# Altium PCB SMC1940-A.PcbDoc (part 2 of 2)
Units mm, origin at the board's own origin, x right, y up, seen from the top; angles counter-clockwise.
Board outline 62.1 x 94.1 mm, 2 copper layers (Top Layer, Bottom Layer); 95 components, 94 nets, 577 pads, 44 vias.
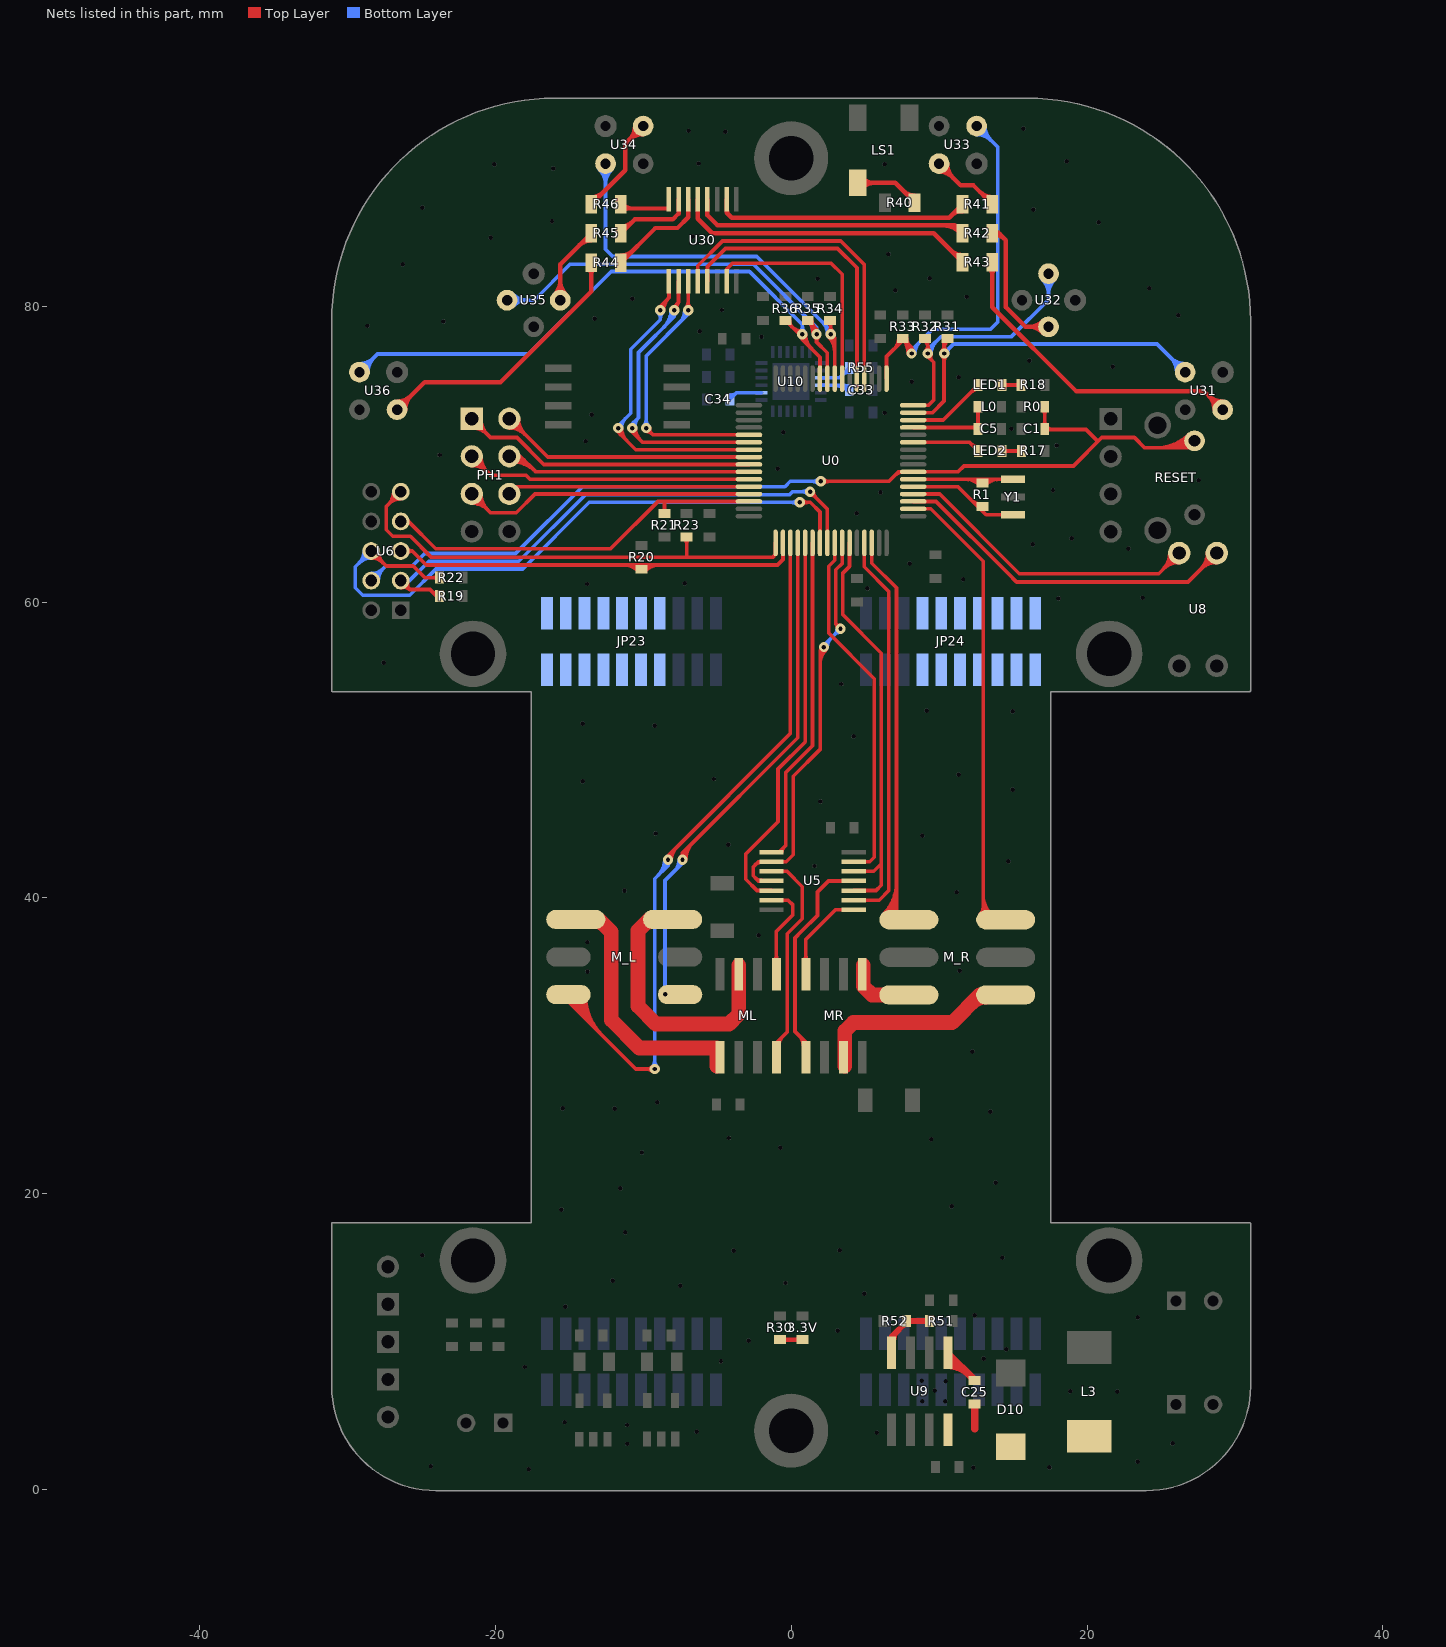
[diagram p2: the nets of this part, all layers, seen from the top]

## Via types
v1: diameter 0.7, hole 0.3, Top Layer to Bottom Layer, tented both sides, 38 vias
v2: diameter 1.2, hole 0.5, Top Layer to Bottom Layer, tented both sides, 3 vias
v3: diameter 1, hole 0.4, Top Layer to Bottom Layer, tented both sides, 3 vias

## Nets (pads, with @x,y where several pads share a name; then routed paths per layer and width w, separated by ;. In a path a pad name is that pad's centre, name@x,y a point inside that pad or via, vN(x,y) a via of type N, cw(c..) or ccw(c..) an arc to the next point about the centre after c; other vN are vias at no path point) (continued)
IN1: U0.20 U30.4 | length 21.4
  Top Layer w0.25: U30.4@-6.305,81.685 -6.305,82.735 -4.64,84.4 3.36,84.4 4.95,82.81 U0.20@4.95,75.1
IN2: U0.21 U30.5 | length 19.6
  Top Layer w0.25: U30.5@-5.655,81.685 -5.655,82.685 -4.44,83.9 3.14,83.9 4.45,82.59 U0.21@4.45,75.1
IN3: U0.23 U30.7 | length 16.8
  Top Layer w0.25: U30.7@-4.355,81.685 -4.355,82.505 -3.96,82.9 2.7,82.9 3.45,82.15 U0.23@3.45,75.1 ; U30.7@-4.33,82.36 cw(c-3.92,82.36) -4.21,82.65 ccw(c-3.92,82.36) U30.7@-4.33,82.36
IN4: U0.39 U30.1 | length 29.7
  Top Layer w0.25: v1(-11.68,71.76) -11.68,71.48 -10.5,70.3 U0.39@-2.85,70.3 ; v1(-8.84,79.72) -8.84,79.98 -8.255,80.565 U30.1@-8.255,81.685 ; v1@-11.705,71.76 ccw(c-11.089,71.76) -11.525,71.325 cw(c-11.089,71.76) v1@-11.705,71.76 ; v1@-11.455,71.76 ccw(c-10.236,71.76) -11.098,70.898 cw(c-10.236,71.76) v1@-11.455,71.76 ; v1@-8.865,79.72 cw(c-8.298,79.72) -8.699,80.121 ccw(c-8.298,79.72) v1@-8.865,79.72 ; v1@-8.615,79.72 cw(c-7.444,79.72) -8.272,80.548 ccw(c-7.444,79.72) v1@-8.615,79.72
  Bottom Layer w0.25: v1(-11.68,71.76) -11.68,71.92 -10.84,72.76 -10.84,77.08 -8.84,79.08 v1(-8.84,79.72) ; -8.84,79.177 ccw(c-9.383,79.177) -8.999,79.561 cw(c-9.383,79.177) -8.84,79.177 ; -8.84,79.177 cw(c-8.297,79.177) -8.681,79.561 ccw(c-8.297,79.177) -8.84,79.177 ; v1@-11.455,71.76 cw(c-10.526,71.76) -11.183,72.417 ccw(c-10.526,71.76) v1@-11.455,71.76
IN5: U0.38 U30.2 | length 30.9
  Top Layer w0.25: v1(-10.74,71.76) -10.74,71.5 -10.04,70.8 U0.38@-2.85,70.8 ; v1(-7.9,79.72) -7.9,79.96 -7.605,80.255 ; U30.2@-7.605,81.685 -7.605,80.255 ; -7.605,80.255 ccw(c-7.316,79.966) -7.693,79.807 cw(c-7.316,79.966) -7.605,80.255 ; v1@-10.765,71.76 ccw(c-10.198,71.76) -10.599,71.359 cw(c-10.198,71.76) v1@-10.765,71.76 ; v1@-10.515,71.76 ccw(c-9.344,71.76) -10.172,70.932 cw(c-9.344,71.76) v1@-10.515,71.76
  Bottom Layer w0.25: v1(-10.74,71.76) -10.74,72.04 -10.32,72.46 ; v1(-7.9,79.72) -7.9,79.28 ; -10.32,72.46 ccw(c-9.805,71.945) -10.519,71.804 cw(c-9.805,71.945) -10.32,72.46 ; -10.32,72.46 -10.32,76.86 -7.9,79.28 ; -7.9,79.28 ccw(c-8.218,79.28) -8.032,79.538 cw(c-8.218,79.28) -7.9,79.28 ; -7.9,79.28 cw(c-7.582,79.28) -7.768,79.538 ccw(c-7.582,79.28) -7.9,79.28 ; v1@-10.765,71.755 cw(c-10.358,71.836) -10.651,72.129 ccw(c-10.358,71.836) v1@-10.765,71.755 ; -8.595,78.585 ccw(c-9.73,79.72) -8.125,79.72 cw(c-9.73,79.72) -8.595,78.585 ; -8.168,79.012 ccw(c-8.877,79.72) -7.875,79.72 cw(c-8.877,79.72) -8.168,79.012
IN6: U0.37 U30.3 | length 26.1
  Top Layer w0.25: v1(-9.8,71.76) -9.34,71.3 U0.37@-2.85,71.3 ; v1@-6.955,79.725 U30.3@-6.955,81.685 ; -9.416,71.376 ccw(c-9.8,70.992) -9.8,71.535 cw(c-9.8,70.992) -9.416,71.376 ; -9.416,71.376 cw(c-9.032,71.76) -9.575,71.76 ccw(c-9.032,71.76) -9.416,71.376 ; v1@-7.119,79.879 ccw(c-7.515,80.275) -6.955,80.275 cw(c-7.515,80.275) v1@-7.119,79.879 ; -6.955,80.251 ccw(c-6.429,80.251) -6.801,79.879 cw(c-6.429,80.251) -6.955,80.251
  Bottom Layer w0.25: v1(-9.8,71.76) -9.8,76.62 -6.96,79.46 v1(-6.96,79.72) ; -9.8,72.303 ccw(c-9.257,72.303) -9.641,71.919 cw(c-9.257,72.303) -9.8,72.303 ; -9.8,72.303 cw(c-10.343,72.303) -9.959,71.919 ccw(c-10.343,72.303) -9.8,72.303 ; -7.528,78.892 ccw(c-8.356,79.72) -7.185,79.72 cw(c-8.356,79.72) -7.528,78.892 ; -7.101,79.319 ccw(c-7.502,79.72) -6.935,79.72 cw(c-7.502,79.72) -7.101,79.319
JNTRST: R19.1 U0.56 U6.3 | length 43.6
  Top Layer w0.25: U6.3@-26.38,61.45 -25.78,60.85 ; R19.1@-23.976,60.416 R19.1@-23.776,60.416 ; R19.1@-23.96,60.4 -24.41,60.85 -25.78,60.85 ; v1(1.28,67.46) 2.45,66.29 U0.56@2.45,64 ; -25.78,60.85 ccw(c-26.148,60.482) -26.269,60.988 cw(c-26.148,60.482) -25.78,60.85 ; -25.78,60.85 cw(c-25.412,61.218) -25.918,61.339 ccw(c-25.412,61.218) -25.78,60.85 ; 1.664,67.076 ccw(c1.28,66.692) 1.28,67.235 cw(c1.28,66.692) 1.664,67.076 ; 1.664,67.076 cw(c2.048,67.46) 1.505,67.46 ccw(c2.048,67.46) 1.664,67.076 ; -24.26,60.7 ccw(c-24.023,60.937) -23.85,60.65 cw(c-24.023,60.937) -24.26,60.7
  Bottom Layer w0.25: U6.3@-26.38,61.45 -25.79,61.45 -24.48,62.76 -18.4,62.76 -13.9,67.26 -0.1,67.26 0.1,67.46 v1(1.28,67.46) ; 0.737,67.46 ccw(c0.737,68.003) 1.121,67.619 cw(c0.737,68.003) 0.737,67.46 ; 0.737,67.46 cw(c0.737,66.917) 1.121,67.301 ccw(c0.737,66.917) 0.737,67.46
JTCK: R23.2 U0.49 U6.9 | length 37.2
  Top Layer w0.25: U6.9@-26.38,67.45 -27.37,66.46 -27.37,64.88 -26.93,64.44 -25.73,64.44 -24.31,63.02 -1.26,63.02 -1.05,63.23 U0.49@-1.05,64 ; -7.06,63.02 R23.2@-7.06,64.39 ; -27.191,66.639 ccw(c-28.002,67.45) -26.855,67.45 cw(c-28.002,67.45) -27.191,66.639 ; -27.191,66.639 cw(c-26.38,65.828) -26.38,66.975 ccw(c-26.38,65.828) -27.191,66.639 ; -7.06,63.968 ccw(c-7.482,63.968) -7.184,64.266 cw(c-7.482,63.968) -7.06,63.968 ; -7.06,63.968 cw(c-6.638,63.968) -6.936,64.266 ccw(c-6.638,63.968) -7.06,63.968
JTDI: R20.1 U0.50 U6.5 | length 36.5
  Top Layer w0.25: U6.5@-26.38,63.45 -25.61,63.45 ; U0.50@-0.55,64 -0.55,62.87 -0.92,62.5 -24.66,62.5 -25.61,63.45 ; -25.61,63.45 ccw(c-25.61,63.063) -25.955,63.237 cw(c-25.61,63.063) -25.61,63.45 ; -25.61,63.45 cw(c-25.61,63.837) -25.955,63.663 ccw(c-25.61,63.837) -25.61,63.45 ; -11.298,62.5 cw(c-11.298,61.122) -10.324,62.096 ccw(c-11.298,61.122) -11.298,62.5 ; -10.695,62.5 cw(c-10.695,61.725) -10.147,62.273 ccw(c-10.695,61.725) -10.695,62.5 ; R20.1@-10.23,62.45 cw(c-10.109,62.329) -10.109,62.5 ccw(c-10.109,62.329) R20.1@-10.23,62.45 ; R20.1@-10.091,62.5 cw(c-10.091,62.329) -9.97,62.45 ccw(c-10.091,62.329) R20.1@-10.091,62.5 ; R20.1@-10.053,62.273 cw(c-9.505,61.725) -9.505,62.5 ccw(c-9.505,61.725) R20.1@-10.053,62.273 ; R20.1@-9.876,62.096 cw(c-8.902,61.122) -8.902,62.5 ccw(c-8.902,61.122) R20.1@-9.876,62.096
JTDO: R22.1 U0.55 U6.6 | length 56.8
  Top Layer w0.25: U6.6@-28.38,63.45 -27.37,62.44 -25.54,62.44 -24.75,61.65 R22.1@-23.76,61.65 ; v1(0.58,66.74) 1.3,66.74 1.95,66.09 U0.55@1.95,64 ; -27.569,62.639 ccw(c-28.38,61.828) -28.38,62.975 cw(c-28.38,61.828) -27.569,62.639 ; -27.569,62.639 cw(c-26.758,63.45) -27.905,63.45 ccw(c-26.758,63.45) -27.569,62.639 ; -24.182,61.65 ccw(c-24.182,62.072) -23.884,61.774 cw(c-24.182,62.072) -24.182,61.65 ; -24.182,61.65 cw(c-24.182,61.228) -23.884,61.526 ccw(c-24.182,61.228) -24.182,61.65 ; 1.123,66.74 ccw(c1.123,66.197) 0.739,66.581 cw(c1.123,66.197) 1.123,66.74 ; 1.123,66.74 cw(c1.123,67.283) 0.739,66.899 ccw(c1.123,67.283) 1.123,66.74
  Bottom Layer w0.25: U6.6@-28.38,63.45 -29.45,62.38 -29.45,60.96 -28.95,60.46 -25.78,60.46 -24,62.24 -18.14,62.24 -13.64,66.74 v1(0.58,66.74) ; -29.191,62.639 ccw(c-30.002,63.45) -28.855,63.45 cw(c-30.002,63.45) -29.191,62.639 ; -29.191,62.639 cw(c-28.38,61.828) -28.38,62.975 ccw(c-28.38,61.828) -29.191,62.639 ; 0.037,66.74 ccw(c0.037,67.283) 0.421,66.899 cw(c0.037,67.283) 0.037,66.74 ; 0.037,66.74 cw(c0.037,66.197) 0.421,66.581 ccw(c0.037,66.197) 0.037,66.74
JTMS: R21.1 U0.46 U6.7 | length 27.8
  Top Layer w0.25: U6.7@-26.38,65.45 -25.86,65.45 -24.01,63.6 -12.2,63.6 -9,66.8 U0.46@-2.85,66.8 ; R21.1@-8.56,65.99 -8.56,66.8 ; -8.56,66.412 ccw(c-8.138,66.412) -8.436,66.114 cw(c-8.138,66.412) -8.56,66.412 ; -8.56,66.412 cw(c-8.982,66.412) -8.684,66.114 ccw(c-8.982,66.412) -8.56,66.412
LED1: LED2.1 U0.11 | length 5.7
  Top Layer w0.25: U0.11@8.25,70.8 12.06,70.8 LED2.1@12.65,70.21 ; 12.181,70.679 ccw(c12.65,71.149) 12.65,70.485 cw(c12.65,71.149) 12.181,70.679
LED2: LED1.1 U0.14 | length 6.4
  Top Layer w0.25: U0.14@8.25,72.3 10.28,72.3 LED1.1@12.65,74.67 ; 12.181,74.201 cw(c12.65,73.731) 12.65,74.395 ccw(c12.65,73.731) 12.181,74.201
MOTOR_L0: U0.53 U5.5 | length 26.5
  Top Layer w0.25: U5.5@-1.325,40.5 -2.3,40.5 -3.06,41.26 -3.06,42.98 -0.88,45.16 -0.88,48.72 0.95,50.55 U0.53@0.95,64
MOTOR_L1: U0.54 U5.1 | length 23
  Top Layer w0.25: U5.1@-1.325,43.1 -0.8,43.1 -0.36,43.54 -0.36,48.48 1.45,50.29 U0.54@1.45,64 ; U5.1@-0.625,43.1 cw(c-0.202,43.1) -0.501,43.399 ccw(c-0.202,43.1) U5.1@-0.625,43.1
MOTOR_R0: U0.61 U5.9 | length 26.8
  Top Layer w0.25: U5.9@4.225,39.85 5.95,39.85 6.6,40.5 6.6,60.72 4.94,62.38 U0.61@4.94,63.99
MOTOR_R1: U0.57 U5.13 | length 24.2
  Top Layer w0.25: U0.57@2.95,64 2.95,62.83 2.54,62.42 2.54,57.9 5.62,54.82 5.62,42.76 5.31,42.45 U5.13@4.225,42.45
MOUT_L0: M_L.1 ML.1 | length 19.1
  Top Layer w1: M_L.1@-14.55,38.55 -13.01,38.55 -12.16,37.7 -12.16,31.76 -10.26,29.86 -5.02,29.86 ML.1@-5.02,28.64 ; M_L.1@-13.2,38.4 cw(c-13.2,37.579) -12.62,38.16 ccw(c-13.2,37.579) M_L.1@-13.2,38.4
MOUT_L1: M_L.2 ML.7 | length 20.1
  Top Layer w1: M_L.2@-8.01,38.55 -9.59,38.55 -10.34,37.8 -10.34,32.68 -9.14,31.48 -4.2,31.48 -3.535,32.145 ML.7@-3.535,35.455 ; -10.009,38.131 cw(c-9.36,37.483) -9.36,38.4 ccw(c-9.36,37.483) -10.009,38.131
MOUT_R0: M_R.2 MR.1 | length 4.7
  Top Layer w1: MR.1@4.88,35.44 4.88,34.04 5.47,33.45 M_R.2@7.96,33.45
MOUT_R1: M_R.1 MR.7 | length 16.3
  Top Layer w1: MR.7@3.62,28.64 3.62,31 4.2,31.58 10.88,31.58 12.75,33.45 M_R.1@14.5,33.45 ; 12.211,32.911 cw(c13.15,31.972) 13.15,33.3 ccw(c13.15,31.972) 12.211,32.911
Net3.3V_1: 3.3V.1 R30.1 | length 3.8
  Top Layer w0.3: R30.1@-0.76,10.15 3.3V.1@0.781,10.15 ; -0.298,10.15 ccw(c-0.298,9.788) -0.554,10.044 cw(c-0.298,9.788) -0.298,10.15 ; -0.298,10.15 cw(c-0.298,10.512) -0.554,10.256 ccw(c-0.298,10.512) -0.298,10.15 ; 0.319,10.15 ccw(c0.319,10.512) 0.575,10.256 cw(c0.319,10.512) 0.319,10.15 ; 0.319,10.15 cw(c0.319,9.788) 0.575,10.044 ccw(c0.319,9.788) 0.319,10.15
NetC5_2: C5.2 L0.2 U0.13 | length 9.9
  Top Layer w0.25: U0.13@8.25,71.8 C5.2@12.63,71.8 ; C5.2@12.63,71.7 L0.2@12.63,73.2 ; 12.208,71.8 ccw(c12.208,72.222) C5.2@12.506,71.924 ; 12.208,71.8 cw(c12.208,71.378) 12.506,71.676 ccw(c12.208,71.378) 12.208,71.8 ; 12.208,71.8 ccw(c12.208,72.222) C5.2@12.506,71.924 ; C5.2@12.506,71.924 ccw(c12.208,72.222) 12.63,72.222 ; C5.2@12.506,71.924 ccw(c12.208,72.222) 12.63,72.222 ; 12.63,72.222 ccw(c13.052,72.222) 12.754,71.924 cw(c13.052,72.222) 12.63,72.222 ; 12.63,72.678 ccw(c12.208,72.678) 12.506,72.976 cw(c12.208,72.678) 12.63,72.678 ; 12.63,72.678 cw(c13.052,72.678) 12.754,72.976 ccw(c13.052,72.678) 12.63,72.678
NetC25_1: C25.1 D10.2 L3.1 U9.8 | length 1.7
  Top Layer w0.5: 12.4,4.14 C25.1@12.4,5.8
NetC25_2: C25.2 U9.1 | length 6.7
  Top Layer w0.5: U9.1@10.605,9.25 10.605,9.195 C25.2@12.4,7.4 ; U9.1@10.605,8.4 cw(c10.605,6.481) 11.962,7.838 ccw(c10.605,6.481) U9.1@10.605,8.4 ; U9.1@10.605,8.9 cw(c10.605,8.188) 11.109,8.691 ccw(c10.605,8.188) U9.1@10.605,8.9
NetC33_1: C33.1 U10.10 | length 5.5
  Bottom Layer w0.25: U10.10@2,74.65 3.591,74.65 C33.1@3.93,74.311 ; 2.931,74.65 cw(c2.931,73.412) 3.806,74.287 ccw(c2.931,73.412) 2.931,74.65 ; 3.535,74.65 cw(c3.535,74.016) 3.983,74.464 ccw(c3.535,74.016) 3.535,74.65 ; C33.1@3.641,74.6 ccw(c3.768,74.727) 3.85,74.567 cw(c3.768,74.727) C33.1@3.641,74.6
NetC34_2: C34.2 U10.20 | length 3.3
  Bottom Layer w0.25: C34.2@-4.13,73.7 -3.68,74.15 ; U10.20@-2,74.15 -3.68,74.15 ; -3.68,74.15 cw(c-4.104,74.574) -4.124,73.975 ccw(c-4.104,74.574) -3.68,74.15
NetJP23_1: JP23.1 JP23.2 JP23.3 JP23.4 JP23.5 JP23.6 JP23.7 JP23.8 JP23.9 JP23.10 JP23.11 JP23.12 JP23.13 JP23.14
NetJP24_1: JP24.1 JP24.2 JP24.3 JP24.4 JP24.5 JP24.6 JP24.7 JP24.8 JP24.9 JP24.10 JP24.11 JP24.12 JP24.13 JP24.14
NetLED1_2: LED1.2 R18.1 | length 4
  Top Layer w0.25: LED1.2@14.25,74.67 R18.1@15.55,74.67 ; 14.672,74.67 ccw(c14.672,74.248) 14.374,74.546 cw(c14.672,74.248) 14.672,74.67 ; 14.672,74.67 cw(c14.672,75.092) 14.374,74.794 ccw(c14.672,75.092) 14.672,74.67 ; 15.128,74.67 ccw(c15.128,75.092) 15.426,74.794 cw(c15.128,75.092) 15.128,74.67 ; 15.128,74.67 cw(c15.128,74.248) 15.426,74.546 ccw(c15.128,74.248) 15.128,74.67
NetLED2_2: LED2.2 R17.1 | length 4
  Top Layer w0.25: LED2.2@14.25,70.21 R17.1@15.56,70.21 ; 14.672,70.21 ccw(c14.672,69.788) 14.374,70.086 cw(c14.672,69.788) 14.672,70.21 ; 14.672,70.21 cw(c14.672,70.632) 14.374,70.334 ccw(c14.672,70.632) 14.672,70.21 ; 15.138,70.21 ccw(c15.138,70.632) 15.436,70.334 cw(c15.138,70.632) 15.138,70.21 ; 15.138,70.21 cw(c15.138,69.788) 15.436,70.086 ccw(c15.138,69.788) 15.138,70.21
NetLS1_2: LS1.2 R40.2 | length 9.5
  Top Layer w0.3: LS1.2@4.51,88.33 7.04,88.33 R40.2@8.35,87.02 ; 5.596,88.33 ccw(c5.596,87.244) 4.828,88.012 cw(c5.596,87.244) 5.596,88.33 ; 5.596,88.33 cw(c5.596,89.416) 4.828,88.648 ccw(c5.596,89.416) 5.596,88.33 ; 7.573,87.797 ccw(c8.35,88.573) 8.35,87.475 cw(c8.35,88.573) 7.573,87.797
NetML_4: ML.4 U5.3 | length 16
  Top Layer w0.25: U5.3@-1.325,41.8 -0.28,41.8 0.76,40.76 0.76,38.6 -0.26,37.58 -0.26,30.94 -0.945,30.255 ML.4@-0.945,29.25 ; ML.4@-0.82,30.05 cw(c-0.023,30.05) -0.587,30.613 ccw(c-0.023,30.05) ML.4@-0.82,30.05
NetML_5: ML.5 U5.6 | length 8
  Top Layer w0.25: U5.6@-1.325,39.85 -0.21,39.85 0.12,39.52 0.12,38.86 -0.995,37.745 ML.5@-0.995,34.85 ; -0.995,36.072 ccw(c-0.573,36.072) -0.871,35.774 cw(c-0.573,36.072) -0.995,36.072 ; -0.995,36.072 cw(c-1.417,36.072) -1.119,35.774 ccw(c-1.417,36.072) -0.995,36.072
NetMR_4: MR.4 U5.8 | length 7.7
  Top Layer w0.25: MR.4@0.995,34.85 0.995,37.195 3,39.2 U5.8@4.225,39.2 ; 0.995,36.072 ccw(c1.417,36.072) 1.119,35.774 cw(c1.417,36.072) 0.995,36.072 ; 0.995,36.072 cw(c0.573,36.072) 0.871,35.774 ccw(c0.573,36.072) 0.995,36.072
NetMR_5: MR.5 U5.11 | length 16.2
  Top Layer w0.25: MR.5@0.945,29.25 0.945,30.295 0.26,30.98 0.26,37.3 0.692,37.732 1.78,38.82 1.78,40.4 2.53,41.15 U5.11@4.225,41.15 ; 0.558,30.682 cw(c-0.073,30.05) 0.82,30.05 ccw(c-0.073,30.05) 0.558,30.682
NetR1_1: R1.1 U0.6 Y1.2 | length 14
  Top Layer w0.25: U0.6@8.25,68.3 Y1.2@15,68.3 ; 14.148,68.3 ccw(c14.148,68.602) 14.362,68.388 cw(c14.148,68.602) 14.148,68.3 ; 14.148,68.3 cw(c14.148,67.998) 14.362,68.212 ccw(c14.148,67.998) 14.148,68.3 ; 11.804,68.3 cw(c11.804,67.024) 12.706,67.926 ccw(c11.804,67.024) 11.804,68.3 ; 12.408,68.3 cw(c12.408,67.628) 12.883,68.103 ccw(c12.408,67.628) 12.408,68.3 ; R1.1@12.8,68.28 cw(c12.849,68.231) 12.849,68.3 ccw(c12.849,68.231) R1.1@12.8,68.28 ; R1.1@12.977,68.103 cw(c13.452,67.628) 13.452,68.3 ccw(c13.452,67.628) R1.1@12.977,68.103 ; R1.1@13.011,68.3 cw(c13.011,68.231) 13.06,68.28 ccw(c13.011,68.231) R1.1@13.011,68.3 ; R1.1@13.154,67.926 cw(c14.056,67.024) 14.056,68.3 ccw(c14.056,67.024) R1.1@13.154,67.926
NetR1_2: R1.2 U0.5 Y1.1 | length 9.9
  Top Layer w0.25: U0.5@8.25,67.8 11.28,67.8 13.18,65.9 Y1.1@15,65.9 ; 14.148,65.9 ccw(c14.148,66.202) 14.362,65.988 cw(c14.148,66.202) 14.148,65.9 ; 14.148,65.9 cw(c14.148,65.598) 14.362,65.812 ccw(c14.148,65.598) 14.148,65.9 ; 12.19,66.89 ccw(c12.83,67.53) 12.83,66.625 cw(c12.83,67.53) 12.19,66.89
NetR41_1: R41.1 U30.10 | length 20.1
  Top Layer w0.3: U30.10@-4.355,87.235 -4.355,86.315 -4.02,85.98 10.682,85.98 R41.1@11.595,86.892 ; U30.10@-4.355,86.56 ccw(c-3.764,86.56) -4.182,86.142 cw(c-3.764,86.56) U30.10@-4.355,86.56 ; 10.784,86.082 cw(c11.595,85.271) 11.595,86.417 ccw(c11.595,85.271) 10.784,86.082
NetR41_2: R41.2 U33.2 | length 10.7
  Top Layer w0.3: U33.2@10,89.63 11.47,88.16 12.327,88.16 R41.2@13.595,86.892 ; 10.939,88.691 ccw(c10,87.752) 10,89.08 cw(c10,87.752) 10.939,88.691 ; 10.939,88.691 cw(c11.878,89.63) 10.55,89.63 ccw(c11.878,89.63) 10.939,88.691 ; 12.784,87.703 ccw(c13.595,88.514) 13.595,87.367 cw(c13.595,88.514) 12.784,87.703
NetR42_1: R42.1 U30.12 | length 23.4
  Top Layer w0.3: U30.12@-5.655,87.235 -5.655,86.135 -4.98,85.46 11.066,85.46 R42.1@11.595,84.931 ; 10.258,85.46 cw(c10.258,83.819) 11.418,84.979 ccw(c10.258,83.819) 10.258,85.46 ; 10.982,85.46 cw(c10.982,84.543) 11.63,85.192 ccw(c10.982,84.543) 10.982,85.46 ; 11.179,85.347 ccw(c11.306,85.475) 11.427,85.341 cw(c11.306,85.475) 11.179,85.347
NetR42_2: R42.2 U32.2 | length 17.6
  Top Layer w0.3: R42.2@13.595,84.931 14.049,84.931 ; U32.2@17.398,78.602 15.838,78.602 14.52,79.92 14.52,84.46 14.049,84.931 ; 14.049,84.931 ccw(c14.049,84.644) 13.806,84.798 cw(c14.049,84.644) 14.049,84.931 ; 14.049,84.931 cw(c14.049,85.218) 13.806,85.065 ccw(c14.049,85.218) 14.049,84.931 ; 16.07,78.602 ccw(c16.07,79.93) 17.009,78.991 cw(c16.07,79.93) 16.07,78.602 ; 16.07,78.602 cw(c16.07,77.274) 17.009,78.213 ccw(c16.07,77.274) 16.07,78.602 ; R42.2@13.514,85.047 cw(c13.658,84.44) 14.099,84.881 ccw(c13.658,84.44) R42.2@13.514,85.047 ; R42.2@13.583,84.755 cw(c13.804,83.825) 14.479,84.501 ccw(c13.804,83.825) R42.2@13.583,84.755
NetR43_1: R43.1 U30.13 | length 22.2
  Top Layer w0.3: U30.13@-6.305,87.235 -6.305,85.905 -5.32,84.92 9.645,84.92 R43.1@11.595,82.97 ; 10.784,83.781 ccw(c11.595,84.592) 11.595,83.445 cw(c11.595,84.592) 10.784,83.781
NetR43_2: R43.2 U31.2 | length 27.6
  Top Layer w0.3: R43.2@13.595,82.97 13.595,79.925 19.26,74.26 27.91,74.26 U31.2@29.17,73 ; 13.595,82.141 ccw(c12.991,82.141) 13.418,82.568 cw(c12.991,82.141) 13.595,82.141 ; 13.595,82.141 cw(c14.198,82.141) 13.772,82.568 ccw(c14.198,82.141) 13.595,82.141 ; 28.231,73.939 ccw(c29.17,74.878) 29.17,73.55 cw(c29.17,74.878) 28.231,73.939 ; 28.231,73.939 cw(c27.292,73) 28.62,73 ccw(c27.292,73) 28.231,73.939
NetR44_1: R44.1 U30.14 | length 8.9
  Top Layer w0.3: R44.1@-11.51,82.94 -9.17,85.28 -7.68,85.28 -6.955,86.005 U30.14@-6.955,87.235 ; R44.1@-11.51,83.415 ccw(c-11.51,84.562) -10.699,83.751 cw(c-11.51,84.562) R44.1@-11.51,83.415
NetR44_2: R44.2 U36.2 | length 24.4
  Top Layer w0.3: U36.2@-26.63,73 -24.77,74.86 -19.64,74.86 -13.51,80.99 R44.2@-13.51,82.94 ; -25.691,73.939 ccw(c-24.752,73) -26.08,73 cw(c-24.752,73) -25.691,73.939 ; -25.691,73.939 cw(c-26.63,74.878) -26.63,73.55 ccw(c-26.63,74.878) -25.691,73.939 ; -13.51,82.111 ccw(c-14.114,82.111) -13.687,82.538 cw(c-14.114,82.111) -13.51,82.111 ; -13.51,82.111 cw(c-12.906,82.111) -13.333,82.538 ccw(c-12.906,82.111) -13.51,82.111
NetR45_1: R45.1 U30.15 | length 7.2
  Top Layer w0.3: R45.1@-11.51,84.91 -10.56,85.86 -8,85.86 -7.605,86.255 U30.15@-7.605,87.235 ; R45.1@-11.51,85.385 ccw(c-11.51,86.532) -10.699,85.721 cw(c-11.51,86.532) R45.1@-11.51,85.385
NetR45_2: R45.2 U35.2 | length 11.4
  Top Layer w0.3: U35.2@-15.602,80.398 -15.602,82.818 R45.2@-13.51,84.91 ; -15.602,81.726 ccw(c-14.274,81.726) -15.213,80.787 cw(c-14.274,81.726) -15.602,81.726 ; -15.602,81.726 cw(c-16.93,81.726) -15.991,80.787 ccw(c-16.93,81.726) -15.602,81.726 ; -14.321,84.1 cw(c-13.51,83.289) -13.51,84.435 ccw(c-13.51,83.289) -14.321,84.1
NetR46_1: R46.1 U30.16 | length 5.1
  Top Layer w0.3: R46.1@-11.49,86.6 U30.16@-8.28,86.6 ; R46.1@-11.333,86.479 cw(c-11.041,86.187) -11.041,86.6 ccw(c-11.041,86.187) R46.1@-11.333,86.479 ; R46.1@-11.333,86.833 ccw(c-10.772,87.394) -10.772,86.6 cw(c-10.772,87.394) R46.1@-11.333,86.833
NetR46_2: R46.2 U34.2 | length 12.7
  Top Layer w0.3: R46.2@-13.51,86.881 -11.2,89.191 -11.2,90.97 U34.2@-10,92.17 ; -10.939,91.231 ccw(c-11.878,92.17) -10.55,92.17 cw(c-11.878,92.17) -10.939,91.231 ; -10.939,91.231 cw(c-10,90.292) -10,91.62 ccw(c-10,90.292) -10.939,91.231 ; R46.2@-13.51,87.356 ccw(c-13.51,88.503) -12.699,87.692 cw(c-13.51,88.503) R46.2@-13.51,87.356
NetR51_1: R51.1 R52.2 U9.4 | length 6.1
  Top Layer w0.4: U9.4@6.795,9.25 6.795,10.335 7.87,11.41 R51.1@9.36,11.41 ; U9.4@6.895,10.05 cw(c7.824,10.05) 7.167,10.707 ccw(c7.824,10.05) U9.4@6.895,10.05 ; R52.2@7.571,11.111 cw(c7.81,10.872) 7.81,11.21 ccw(c7.81,10.872) R52.2@7.571,11.111
NetR55_2: R55.2 U10.9 | length 3.3
  Bottom Layer w0.25: U10.9@2,75.15 3.258,75.15 R55.2@3.93,75.822 ; 3.461,75.353 cw(c3.93,74.884) 3.93,75.547 ccw(c3.93,74.884) 3.461,75.353
NRST: C1.2 R0.1 RESET.1 U0.7 U6.4 | length 91.7
  Top Layer w0.25: v1(2,68.16) 6.62,68.16 7.26,68.8 11.28,68.8 11.68,69.2 19.08,69.2 21,71.12 23.2,71.12 23.9,70.42 26.79,70.42 RESET.1@27.27,70.9 ; R0.1@17.14,73.2 C1.2@17.14,71.7 17.174,71.666 19.93,71.666 20.737,70.859 ; 2.543,68.16 ccw(c2.543,67.617) 2.159,68.001 cw(c2.543,67.617) 2.543,68.16 ; 2.543,68.16 cw(c2.543,68.703) 2.159,68.319 ccw(c2.543,68.703) 2.543,68.16 ; 17.14,72.222 ccw(c17.562,72.222) 17.264,71.924 cw(c17.562,72.222) 17.14,72.222 ; 17.14,72.222 cw(c16.718,72.222) 17.016,71.924 ccw(c16.718,72.222) 17.14,72.222 ; 17.14,72.678 ccw(c16.718,72.678) 17.016,72.976 cw(c16.718,72.678) 17.14,72.678 ; 17.14,72.678 cw(c17.562,72.678) 17.264,72.976 ccw(c17.562,72.678) 17.14,72.678 ; 7.048,68.588 cw(c7.5,68.135) 7.5,68.775 ccw(c7.5,68.135) 7.048,68.588 ; 7.14,68.68 cw(c7.4,68.42) 7.494,68.776 ccw(c7.4,68.42) 7.14,68.68 ; C1.2@17.264,71.576 cw(c17.48,71.36) 17.48,71.666 ccw(c17.48,71.36) C1.2@17.264,71.576 ; C1.2@17.264,71.824 ccw(c17.645,72.205) 17.645,71.666 cw(c17.645,72.205) C1.2@17.264,71.824 ; 24.723,70.42 ccw(c24.723,73.447) 26.863,71.307 cw(c24.723,73.447) 24.723,70.42 ; 25.327,70.42 ccw(c25.327,72.843) 27.04,71.13 cw(c25.327,72.843) 25.327,70.42 ; 25.93,70.42 ccw(c25.93,72.24) 27.217,70.953 cw(c25.93,72.24) 25.93,70.42 ; 26.534,70.42 ccw(c26.534,71.636) 27.394,70.776 cw(c26.534,71.636) 26.534,70.42
  Bottom Layer w0.25: U6.4@-28.38,61.45 -27.39,62.44 -25.6,62.44 -24.76,63.28 -18.62,63.28 -14.1,67.8 -0.42,67.8 -0.06,68.16 v1(2,68.16) ; -27.569,62.261 ccw(c-26.758,61.45) -27.905,61.45 cw(c-26.758,61.45) -27.569,62.261 ; -27.569,62.261 cw(c-28.38,63.072) -28.38,61.925 ccw(c-28.38,63.072) -27.569,62.261 ; 1.457,68.16 ccw(c1.457,68.703) 1.841,68.319 cw(c1.457,68.703) 1.457,68.16 ; 1.457,68.16 cw(c1.457,67.617) 1.841,68.001 ccw(c1.457,67.617) 1.457,68.16
PA8: PH1.1 U0.41 | length 27.6
  Top Layer w0.25: PH1.1@-21.58,72.39 -20.31,71.12 -18.53,71.12 -16.71,69.3 U0.41@-2.85,69.3 ; PH1.1@-20.94,71.75 ccw(c-21.58,71.11) -21.58,72.015 cw(c-21.58,71.11) PH1.1@-20.94,71.75 ; PH1.1@-20.94,71.75 cw(c-20.3,72.39) -21.205,72.39 ccw(c-20.3,72.39) PH1.1@-20.94,71.75 ; -20.513,71.323 ccw(c-21.58,70.256) -21.58,71.765 cw(c-21.58,70.256) -20.513,71.323 ; -20.513,71.323 cw(c-19.446,72.39) -20.955,72.39 ccw(c-19.446,72.39) -20.513,71.323
PC9: PH1.2 U0.40 | length 24.8
  Top Layer w0.25: PH1.2@-19.04,72.39 -16.45,69.8 U0.40@-2.85,69.8 ; -18.4,71.75 ccw(c-19.04,71.11) -19.04,72.015 cw(c-19.04,71.11) -18.4,71.75 ; -18.4,71.75 cw(c-17.76,72.39) -18.665,72.39 ccw(c-17.76,72.39) -18.4,71.75 ; -17.973,71.323 ccw(c-19.04,70.256) -19.04,71.765 cw(c-19.04,70.256) -17.973,71.323 ; -17.973,71.323 cw(c-16.906,72.39) -18.415,72.39 ccw(c-16.906,72.39) -17.973,71.323
PWM_L: U0.58 U5.2 U5.4 | length 38.8
  Top Layer w0.25: U5.4@-1.325,41.15 -2.21,41.15 -2.56,41.5 -2.56,42.1 -2.21,42.45 -0.33,42.45 0.14,42.92 0.14,48.22 1.96,50.04 1.96,56.7 ; v1(2.22,56.96) 1.96,56.7 ; v1(3.34,58.2) 3.02,58.52 ; U0.58@3.45,64 3.45,62.61 3.02,62.18 3.02,58.52 ; 1.96,56.7 ccw(c1.827,56.833) 2.006,56.891 cw(c1.827,56.833) 1.96,56.7 ; 1.96,56.7 cw(c2.093,56.567) 2.151,56.746 ccw(c2.093,56.567) 1.96,56.7 ; 3.02,58.52 ccw(c3.262,58.762) 3.309,58.423 cw(c3.262,58.762) 3.02,58.52 ; 3.02,58.52 cw(c2.778,58.278) 3.117,58.231 ccw(c2.778,58.278) 3.02,58.52 ; -2.401,41.341 ccw(c-2,41.742) -2,41.175 cw(c-2,41.742) -2.401,41.341 ; -2.401,42.259 cw(c-2,41.858) -2,42.425 ccw(c-2,41.858) -2.401,42.259 ; -2.315,42.345 cw(c-2.092,42.122) -2.007,42.426 ccw(c-2.092,42.122) -2.315,42.345 ; 1.96,55.789 cw(c3.391,55.789) 2.379,56.801 ccw(c3.391,55.789) 1.96,55.789 ; 1.96,56.393 cw(c2.787,56.393) 2.202,56.978 ccw(c2.787,56.393) 1.96,56.393
  Bottom Layer w0.25: v1(2.22,56.96) 2.22,57.08 v1(3.34,58.2) ; 2.956,57.816 ccw(c2.572,58.2) 3.115,58.2 cw(c2.572,58.2) 2.956,57.816 ; 2.956,57.816 cw(c3.34,57.432) 3.34,57.975 ccw(c3.34,57.432) 2.956,57.816 ; v1@2.445,56.96 cw(c3.278,56.96) 2.689,57.549 ccw(c3.278,56.96) v1@2.445,56.96
PWM_R: U0.59 U5.10 U5.12 | length 28.5
  Top Layer w0.25: U0.59@3.95,64 3.95,62.41 3.5,61.96 3.5,59.14 6.1,56.54 6.1,40.86 5.74,40.5 U5.10@4.225,40.5 ; U5.12@4.225,41.8 5.58,41.8 6.1,42.32
RAY_OUT1: R31.2 U0.15 U31.4 | length 37.2
  Top Layer w0.25: U0.15@8.25,72.8 9.56,72.8 10.34,73.58 R31.2@10.34,77.8 ; 10.34,76.257 ccw(c9.797,76.257) 10.181,76.641 cw(c9.797,76.257) 10.34,76.257 ; 10.34,76.257 cw(c10.883,76.257) 10.499,76.641 ccw(c10.883,76.257) 10.34,76.257 ; 10.34,77.343 ccw(c10.883,77.343) 10.499,76.959 cw(c10.883,77.343) 10.34,77.343 ; 10.34,77.343 cw(c9.797,77.343) 10.181,76.959 ccw(c9.797,77.343) 10.34,77.343 ; v1@10.34,77.089 cw(c11.184,77.089) 10.587,77.686 ccw(c11.184,77.089) v1@10.34,77.089
  Bottom Layer w0.25: v1(10.34,76.8) 10.98,77.44 24.73,77.44 U31.4@26.63,75.54 ; 10.724,77.184 ccw(c11.108,76.8) 10.565,76.8 cw(c11.108,76.8) 10.724,77.184 ; 10.724,77.184 cw(c10.34,77.568) 10.34,77.025 ccw(c10.34,77.568) 10.724,77.184 ; 25.648,76.522 ccw(c26.63,77.503) 26.63,76.115 cw(c26.63,77.503) 25.648,76.522 ; 25.648,76.522 cw(c24.667,75.54) 26.055,75.54 ccw(c24.667,75.54) 25.648,76.522 ; 26.075,76.095 ccw(c26.63,76.65) 26.63,75.865 cw(c26.63,76.65) 26.075,76.095 ; 26.075,76.095 cw(c25.52,75.54) 26.305,75.54 ccw(c25.52,75.54) 26.075,76.095
RAY_OUT2: R32.2 U0.16 U32.4 | length 31.8
  Top Layer w0.25: U0.16@8.25,73.3 9.28,73.3 9.64,73.66 9.64,76.2 9.24,76.6 R32.2@9.24,77.82 ; 9.24,77.343 ccw(c9.783,77.343) 9.399,76.959 cw(c9.783,77.343) 9.24,77.343 ; 9.24,77.343 cw(c8.697,77.343) 9.081,76.959 ccw(c8.697,77.343) 9.24,77.343 ; R32.2@9.029,77.686 cw(c8.518,77.176) 9.24,77.176 ccw(c8.518,77.176) R32.2@9.029,77.686 ; v1@9.45,76.72 ccw(c9.819,76.579) 9.54,76.3 cw(c9.819,76.579) v1@9.45,76.72
  Bottom Layer w0.25: v1(9.24,76.8) 9.24,77.04 9.429,77.229 ; U32.4@17.398,82.194 17.398,80.438 14.9,77.94 10.14,77.94 9.429,77.229 ; v1@9.415,76.942 cw(c9.581,77.077) 9.429,77.229 ; v1@9.415,76.942 cw(c9.581,77.077) 9.429,77.229 ; v1@9.415,76.942 cw(c9.581,77.077) 9.429,77.229 ; v1@9.415,76.942 cw(c9.581,77.077) 9.429,77.229 ; 17.398,80.806 ccw(c16.01,80.806) 16.991,81.787 cw(c16.01,80.806) 17.398,80.806 ; 17.398,80.806 cw(c18.786,80.806) 17.805,81.787 ccw(c18.786,80.806) 17.398,80.806 ; 17.398,81.409 ccw(c16.613,81.409) 17.168,81.964 cw(c16.613,81.409) 17.398,81.409 ; 17.398,81.409 cw(c18.183,81.409) 17.628,81.964 ccw(c18.183,81.409) 17.398,81.409 ; v1@9.215,76.8 cw(c9.734,76.8) 9.367,77.167 ccw(c9.734,76.8) v1@9.215,76.8 ; v1@9.465,76.8 cw(c10.588,76.8) 9.794,77.594 ccw(c10.588,76.8) v1@9.465,76.8
RAY_OUT3: R33.2 U0.17 U33.4 | length 41.8
  Top Layer w0.25: U0.17@6.45,75.1 6.45,76.59 7.541,77.681 R33.2@7.541,77.81 8.14,77.211 ; v1(8.14,76.8) 8.14,77.211 ; 8.14,77.211 ccw(c8.403,77.211) 8.261,76.989 cw(c8.403,77.211) 8.14,77.211 ; 8.14,77.211 cw(c7.877,77.211) 8.019,76.989 ccw(c7.877,77.211) 8.14,77.211 ; 6.981,77.121 ccw(c6.291,77.81) 7.266,77.81 cw(c6.291,77.81) 6.981,77.121 ; R33.2@7.465,77.886 cw(c6.379,76.8) 7.915,76.8 ccw(c6.379,76.8) R33.2@7.465,77.886 ; R33.2@7.816,77.81 ccw(c8.48,77.81) 8.011,77.341 cw(c8.48,77.81) R33.2@7.816,77.81 ; 7.892,77.459 cw(c7.233,76.8) 8.165,76.8 ccw(c7.233,76.8) 7.892,77.459
  Bottom Layer w0.25: v1(8.14,76.8) 8.14,77.02 9.56,78.44 13.48,78.44 13.96,78.92 13.96,90.75 U33.4@12.54,92.17 ; 13.095,91.615 ccw(c12.54,91.06) 12.54,91.845 cw(c12.54,91.06) 13.095,91.615 ; 13.095,91.615 cw(c13.65,92.17) 12.865,92.17 ccw(c13.65,92.17) 13.095,91.615 ; 13.522,91.188 ccw(c12.54,90.207) 12.54,91.595 cw(c12.54,90.207) 13.522,91.188 ; 13.522,91.188 cw(c14.503,92.17) 13.115,92.17 ccw(c14.503,92.17) 13.522,91.188 ; v1@8.115,76.8 cw(c8.586,76.8) 8.253,77.133 ccw(c8.586,76.8) v1@8.115,76.8 ; v1@8.365,76.8 cw(c9.439,76.8) 8.68,77.56 ccw(c9.439,76.8) v1@8.365,76.8
RAY_OUT4: R34.2 U0.24 U34.4 | length 44.7
  Top Layer w0.25: R34.2@2.68,79.02 v1(2.68,78.1) 2.95,77.83 ; U0.24@2.95,75.1 2.95,77.83 ; 2.68,78.643 ccw(c3.223,78.643) 2.839,78.259 cw(c3.223,78.643) 2.68,78.643 ; 2.68,78.643 cw(c2.137,78.643) 2.521,78.259 ccw(c2.137,78.643) 2.68,78.643 ; 2.95,77.83 ccw(c2.8,77.68) 2.742,77.884 cw(c2.8,77.68) 2.95,77.83 ; 2.95,77.83 cw(c3.1,77.98) 2.896,78.038 ccw(c3.1,77.98) 2.95,77.83 ; R34.2@2.51,78.916 cw(c2.099,78.505) 2.68,78.505 ccw(c2.099,78.505) R34.2@2.51,78.916 ; v1@2.521,77.941 cw(c1.485,76.905) 2.95,76.905 ccw(c1.485,76.905) v1@2.521,77.941 ; 2.68,78.73 cw(c2.944,78.73) 2.757,78.916 ccw(c2.944,78.73) 2.68,78.73 ; v1@2.698,78.118 cw(c2.089,77.509) 2.95,77.509 ccw(c2.089,77.509) v1@2.698,78.118
  Bottom Layer w0.25: U34.4@-12.54,89.63 -12.54,83.84 -12.06,83.36 -2.32,83.36 2.68,78.36 v1(2.68,78.1) ; -12.54,88.242 ccw(c-13.928,88.242) -12.947,89.223 cw(c-13.928,88.242) -12.54,88.242 ; -12.54,88.242 cw(c-11.152,88.242) -12.133,89.223 ccw(c-11.152,88.242) -12.54,88.242 ; -12.54,88.845 ccw(c-13.325,88.845) -12.77,89.4 cw(c-13.325,88.845) -12.54,88.845 ; -12.54,88.845 cw(c-11.755,88.845) -12.31,89.4 ccw(c-11.755,88.845) -12.54,88.845 ; 2.112,78.928 cw(c1.284,78.1) 2.455,78.1 ccw(c1.284,78.1) 2.112,78.928 ; 2.539,78.501 cw(c2.138,78.1) 2.705,78.1 ccw(c2.138,78.1) 2.539,78.501
RAY_OUT5: R35.2 U0.25 U35.4 | length 47
  Top Layer w0.25: R35.2@1.122,79.04 1.72,78.442 1.72,77.58 ; U0.25@2.45,75.1 2.45,76.85 1.72,77.58 ; 1.72,77.58 ccw(c1.232,77.58) 1.566,77.936 cw(c1.232,77.58) 1.72,77.58 ; 1.72,77.58 cw(c2.208,77.58) 1.874,77.936 ccw(c2.208,77.58) 1.72,77.58 ; R35.2@1.094,79.069 cw(c0.125,78.1) 1.495,78.1 ccw(c0.125,78.1) R35.2@1.094,79.069 ; R35.2@1.397,79.04 ccw(c2.061,79.04) 1.592,78.571 cw(c2.061,79.04) R35.2@1.397,79.04 ; 1.521,78.642 cw(c0.979,78.1) 1.745,78.1 ccw(c0.979,78.1) 1.521,78.642
  Bottom Layer w0.25: U35.4@-19.194,80.398 -17.362,80.398 -14.92,82.84 -2.56,82.84 1.72,78.56 ; v1(1.72,78.1) 1.72,78.56 ; -18.409,80.398 ccw(c-18.409,79.613) -18.964,80.168 cw(c-18.409,79.613) -18.409,80.398 ; -18.409,80.398 cw(c-18.409,81.183) -18.964,80.628 ccw(c-18.409,81.183) -18.409,80.398 ; -17.806,80.398 ccw(c-17.806,79.01) -18.787,79.991 cw(c-17.806,79.01) -17.806,80.398 ; -17.806,80.398 cw(c-17.806,81.786) -18.787,80.805 ccw(c-17.806,81.786) -17.806,80.398 ; 1.72,78.56 ccw(c2.078,78.56) 1.858,78.278 cw(c2.078,78.56) 1.72,78.56 ; 1.72,78.56 cw(c1.362,78.56) 1.582,78.278 ccw(c1.362,78.56) 1.72,78.56 ; 1.011,79.269 cw(c-0.159,78.1) 1.495,78.1 ccw(c-0.159,78.1) 1.011,79.269 ; 1.437,78.843 cw(c0.695,78.1) 1.745,78.1 ccw(c0.695,78.1) 1.437,78.843
RAY_OUT6: R36.2 U0.26 U36.4 | length 56.3
  Top Layer w0.25: R36.2@-0.389,78.949 R36.2@-0.389,79.04 0.551,78.1 v1(0.76,78.1) 0.76,77.74 ; U0.26@1.95,75.1 1.95,76.55 0.76,77.74 ; v1@0.661,77.898 cw(c0.585,77.74) 0.76,77.74 ; v1@0.661,77.898 cw(c0.585,77.74) 0.76,77.74 ; v1@0.661,77.898 cw(c0.585,77.74) 0.76,77.74 ; v1@0.661,77.898 cw(c0.585,77.74) 0.76,77.74 ; 0.76,77.74 cw(c0.935,77.74) v1@0.859,77.898 ; 0.76,77.74 cw(c0.935,77.74) v1@0.859,77.898 ; 0.76,77.74 cw(c0.935,77.74) v1@0.859,77.898 ; 0.76,77.74 cw(c0.935,77.74) v1@0.859,77.898 ; R36.2@-0.114,79.04 ccw(c0.55,79.04) 0.081,78.571 cw(c0.55,79.04) R36.2@-0.114,79.04 ; 0.019,78.632 ccw(c0.76,79.372) 0.76,78.325 cw(c0.76,79.372) 0.019,78.632 ; v1@0.735,78.1 ccw(c1.544,78.1) 0.972,77.528 cw(c1.544,78.1) v1@0.735,78.1 ; v1@0.985,78.1 ccw(c2.397,78.1) 1.399,77.101 cw(c2.397,78.1) v1@0.985,78.1
  Bottom Layer w0.25: U36.4@-29.17,75.54 -27.95,76.76 -17.74,76.76 -12.16,82.34 -2.82,82.34 0.76,78.76 v1(0.76,78.1) ; -28.615,76.095 ccw(c-28.06,75.54) -28.845,75.54 cw(c-28.06,75.54) -28.615,76.095 ; -28.615,76.095 cw(c-29.17,76.65) -29.17,75.865 ccw(c-29.17,76.65) -28.615,76.095 ; -28.188,76.522 ccw(c-27.207,75.54) -28.595,75.54 cw(c-27.207,75.54) -28.188,76.522 ; -28.188,76.522 cw(c-29.17,77.503) -29.17,76.115 ccw(c-29.17,77.503) -28.188,76.522 ; 0.76,78.643 ccw(c1.303,78.643) 0.919,78.259 cw(c1.303,78.643) 0.76,78.643 ; 0.76,78.643 cw(c0.217,78.643) 0.601,78.259 ccw(c0.217,78.643) 0.76,78.643
RX1: PH1.3 U0.43 | length 27
  Top Layer w0.25: PH1.3@-21.58,69.85 -20.31,68.58 -17.93,68.58 -17.65,68.3 U0.43@-2.85,68.3 ; -20.94,69.21 ccw(c-21.58,68.57) -21.58,69.475 cw(c-21.58,68.57) -20.94,69.21 ; -20.94,69.21 cw(c-20.3,69.85) -21.205,69.85 ccw(c-20.3,69.85) -20.94,69.21 ; -20.513,68.783 ccw(c-21.58,67.716) -21.58,69.225 cw(c-21.58,67.716) -20.513,68.783 ; -20.513,68.783 cw(c-19.446,69.85) -20.955,69.85 ccw(c-19.446,69.85) -20.513,68.783
SPEED_L0: M_L.6 U0.52 | length 43.9
  Top Layer w0.25: v1(-7.34,42.58) -7.34,43.04 ; U0.52@0.45,64 0.45,50.83 -7.34,43.04 ; -7.34,43.04 ccw(c-6.982,43.04) -7.202,42.758 cw(c-6.982,43.04) -7.34,43.04 ; -7.34,43.04 cw(c-7.698,43.04) -7.478,42.758 ccw(c-7.698,43.04) -7.34,43.04 ; v1@-7.365,42.58 cw(c-6.315,42.58) -7.057,43.323 ccw(c-6.315,42.58) v1@-7.365,42.58 ; v1@-7.115,42.58 cw(c-5.461,42.58) -6.631,43.749 ccw(c-5.461,42.58) v1@-7.115,42.58
  Bottom Layer w0.25: v1(-8.52,33.48) -8.52,41.18 -7.34,42.36 v1(-7.34,42.58) ; -8.52,34.023 ccw(c-7.977,34.023) -8.361,33.639 cw(c-7.977,34.023) -8.52,34.023 ; -8.52,34.023 cw(c-9.063,34.023) -8.679,33.639 ccw(c-9.063,34.023) -8.52,34.023 ; -7.88,41.82 ccw(c-8.639,42.58) -7.565,42.58 cw(c-8.639,42.58) -7.88,41.82 ; -7.453,42.247 ccw(c-7.786,42.58) -7.315,42.58 cw(c-7.786,42.58) -7.453,42.247
SPEED_L1: M_L.5 U0.51 | length 81.1
  Top Layer w0.25: M_L.5@-15.54,33.48 -10.5,28.44 v1(-9.22,28.44) ; v1(-8.32,42.58) -8.32,42.84 -0.05,51.11 U0.51@-0.05,64 ; -9.763,28.44 ccw(c-9.763,28.983) -9.379,28.599 cw(c-9.763,28.983) -9.763,28.44 ; -9.763,28.44 cw(c-9.763,27.897) -9.379,28.281 ccw(c-9.763,27.897) -9.763,28.44 ; M_L.5@-15.425,33.47 ccw(c-15.172,33.47) -15.351,33.291 cw(c-15.172,33.47) M_L.5@-15.425,33.47 ; M_L.5@-15.175,33.47 ccw(c-14.318,33.47) -14.924,32.864 cw(c-14.318,33.47) M_L.5@-15.175,33.47 ; M_L.5@-14.925,33.47 ccw(c-13.464,33.47) -14.497,32.437 cw(c-13.464,33.47) M_L.5@-14.925,33.47 ; M_L.5@-14.675,33.47 ccw(c-12.611,33.47) -14.07,32.01 cw(c-12.611,33.47) M_L.5@-14.675,33.47 ; M_L.5@-14.425,33.47 ccw(c-11.757,33.47) -13.644,31.584 cw(c-11.757,33.47) M_L.5@-14.425,33.47 ; M_L.5@-14.175,33.47 ccw(c-10.904,33.47) -13.217,31.157 cw(c-10.904,33.47) M_L.5@-14.175,33.47 ; M_L.5@-13.925,33.47 ccw(c-10.05,33.47) -12.79,30.73 cw(c-10.05,33.47) M_L.5@-13.925,33.47 ; v1@-8.345,42.58 cw(c-7.778,42.58) -8.179,42.981 ccw(c-7.778,42.58) v1@-8.345,42.58 ; v1@-8.095,42.58 cw(c-6.924,42.58) -7.752,43.408 ccw(c-6.924,42.58) v1@-8.095,42.58
  Bottom Layer w0.25: v1(-9.22,28.44) -9.22,41.3 -8.32,42.2 ; v1(-8.32,42.58) -8.32,42.2 ; -9.22,28.983 ccw(c-8.677,28.983) -9.061,28.599 cw(c-8.677,28.983) -9.22,28.983 ; -9.22,28.983 cw(c-9.763,28.983) -9.379,28.599 ccw(c-9.763,28.983) -9.22,28.983 ; -8.32,42.2 ccw(c-8.528,42.2) -8.428,42.383 cw(c-8.528,42.2) -8.32,42.2 ; -8.32,42.2 cw(c-8.112,42.2) -8.212,42.383 ccw(c-8.112,42.2) -8.32,42.2 ; -8.973,41.547 ccw(c-10.006,42.58) -8.545,42.58 cw(c-10.006,42.58) -8.973,41.547 ; -8.546,41.974 ccw(c-9.152,42.58) -8.295,42.58 cw(c-9.152,42.58) -8.546,41.974
SPEED_R0: M_R.6 U0.62 | length 39.3
  Top Layer w0.25: U0.62@5.45,64 5.45,62.63 7.12,60.96 M_R.6@7.12,38.58 ; M_R.6@6.239,38.901 ccw(c4.111,41.029) 7.12,41.029 cw(c4.111,41.029) M_R.6@6.239,38.901 ; M_R.6@6.416,38.724 ccw(c4.715,40.425) 7.12,40.425 cw(c4.715,40.425) M_R.6@6.416,38.724 ; M_R.6@6.592,38.548 ccw(c5.318,39.822) 7.12,39.822 cw(c5.318,39.822) M_R.6@6.592,38.548 ; M_R.6@6.769,38.371 ccw(c5.922,39.218) 7.12,39.218 cw(c5.922,39.218) M_R.6@6.769,38.371
SPEED_R1: M_R.5 U0.2 | length 36.4
  Top Layer w0.25: U0.2@8.25,66.3 9.44,66.3 12.98,62.76 M_R.5@12.98,38.54 ; M_R.5@12.779,38.901 ccw(c12.293,39.387) 12.98,39.387 cw(c12.293,39.387) M_R.5@12.779,38.901 ; 12.98,39.604 ccw(c14.224,39.604) 13.344,38.724 cw(c14.224,39.604) 12.98,39.604 ; 12.98,40.208 ccw(c14.828,40.208) 13.521,38.901 cw(c14.828,40.208) 12.98,40.208
STATE_1: U0.3 U8.1 | length 32
  Top Layer w0.25: U0.3@8.25,66.8 9.8,66.8 14.686,61.914 ; 15.16,61.44 14.686,61.914 ; U8.1@28.77,63.31 26.82,61.36 15.24,61.36 14.686,61.914 ; 27.683,62.223 ccw(c26.595,63.31) 28.133,63.31 cw(c26.595,63.31) 27.683,62.223 ; 27.683,62.223 cw(c28.77,61.135) 28.77,62.673 ccw(c28.77,61.135) 27.683,62.223 ; 28.109,62.649 ccw(c27.449,63.31) 28.383,63.31 cw(c27.449,63.31) 28.109,62.649 ; 28.109,62.649 cw(c28.77,61.989) 28.77,62.923 ccw(c28.77,61.989) 28.109,62.649
STATE_2: U0.4 U8.2 | length 28.6
  Top Layer w0.25: U0.4@8.25,67.3 10.04,67.3 15.42,61.92 24.84,61.92 U8.2@26.23,63.31 ; 25.143,62.223 ccw(c24.055,63.31) 25.593,63.31 cw(c24.055,63.31) 25.143,62.223 ; 25.143,62.223 cw(c26.23,61.135) 26.23,62.673 ccw(c26.23,61.135) 25.143,62.223 ; 25.569,62.649 ccw(c24.909,63.31) 25.843,63.31 cw(c24.909,63.31) 25.569,62.649 ; 25.569,62.649 cw(c26.23,61.989) 26.23,62.923 ccw(c26.23,61.989) 25.569,62.649
TX1: PH1.4 U0.42 | length 25.7
  Top Layer w0.25: PH1.4@-19.04,69.85 -18.3,69.85 -17.25,68.8 U0.42@-2.85,68.8 ; PH1.4@-19.048,69.975 cw(c-18.963,68.686) -18.049,69.599 ccw(c-18.963,68.686) PH1.4@-19.048,69.975 ; PH1.4@-19.032,69.725 cw(c-18.914,67.955) -17.659,69.209 ccw(c-18.914,67.955) PH1.4@-19.032,69.725 ; PH1.4@-19.015,69.476 cw(c-18.866,67.224) -17.27,68.82 ccw(c-18.866,67.224) PH1.4@-19.015,69.476
USBDM: PH1.6 U0.44 | length 16.4
  Top Layer w0.25: PH1.6@-19.04,67.31 -18.55,67.8 U0.44@-2.85,67.8
USBDP: PH1.5 U0.45 | length 27.4
  Top Layer w0.25: PH1.5@-21.58,67.31 -20.31,66.04 -18.57,66.04 -17.31,67.3 U0.45@-2.85,67.3 ; -20.94,66.67 ccw(c-21.58,66.03) -21.58,66.935 cw(c-21.58,66.03) -20.94,66.67 ; -20.94,66.67 cw(c-20.3,67.31) -21.205,67.31 ccw(c-20.3,67.31) -20.94,66.67 ; -20.513,66.243 ccw(c-21.58,65.176) -21.58,66.685 cw(c-21.58,65.176) -20.513,66.243 ; -20.513,66.243 cw(c-19.446,67.31) -20.955,67.31 ccw(c-19.446,67.31) -20.513,66.243
VDD: 
pads on no net: JP21.15 JP21.16 JP21.17 JP21.18 JP21.19 JP21.20 JP22.15 JP22.16 JP22.17 JP22.18 JP22.19 JP22.20 JP23.15 JP23.16 JP23.17 JP23.18 JP23.19 JP23.20 JP24.15 JP24.16 JP24.17 JP24.18 JP24.19 JP24.20 LS1.0 RESET.0 S1.0 S1.1 U1.4 U2.4 U6.8 U9.2 U9.3 U9.5 U10.2 U10.3 U10.4 U10.5 U10.6 U10.7 U10.14 U10.15 U10.16 U10.17 U10.19 U10.21 U10.22 U30.9

## Polygon pours and split planes (outlines as drawn)
GND on Top Layer "Top Layer-GND" (hatched 45Degree grid 0.18 track 0.2, remove dead copper, pour order 2): -31,94.04 31.06,94.04 31.06,-0.02 -31.06,-0.02 -31.06,94.02
GND on Bottom Layer "Bottom Layer-GND" (hatched 45Degree grid 0.18 track 0.2, remove dead copper, pour order 4): -31.06,0 31.06,0 31.06,94.04 -31.02,94.04 -31.02,-0.02

## Keep-outs
Keep-Out Layer:
  lines w0.1: -31,7 ccw(c-24,7) -24,0 24,0 ccw(c24,7) 31,7 31,18 17.5,18 17.5,54 31,54 31,79 ccw(c16,79) 16,94 -16,94 ccw(c-16,79) -31,79 -31,54 -17.5,54 -17.5,18 -31,18 -31,7

## Other copper
Top Layer:
  rectangle net NetC25_1: 10.48,2.96 19.62,4.46
Bottom Layer:
  region net NetJP23_1: -8.46,60.34 -16.9,60.34 -16.9,54.34 -8.46,54.34
  rectangle net NetJP24_1: 8.46,54.34 16.9,60.34
  rectangle net BT: -16.92,5.66 -8.48,11.66

## Silkscreen, mask and mechanical layers (free items; w line width, h text height)
Top Overlay:
  region: -27.842,79.476 -30.957,97.143 -31.095,97.119 -27.98,79.451
  region: -16.476,90.958 -34.143,87.843 -34.119,87.705 -16.451,90.82
  region: -27.842,79.476 -24.727,97.143 -24.865,97.167 -27.98,79.5
  region: -16.476,90.958 -34.143,94.073 -34.167,93.935 -16.5,90.82
  region: 21.14,84.045 35.836,94.335 35.756,94.45 21.06,84.16
  region: 21.195,84.1 31.485,98.795 31.37,98.876 21.08,84.18
  region: 27.98,79.451 31.095,97.119 30.957,97.143 27.842,79.476
  region: 16.451,90.82 34.119,87.705 34.143,87.843 16.476,90.958
  region: 27.98,79.5 24.865,97.167 24.727,97.143 27.842,79.476
  region: 16.5,90.82 34.167,93.935 34.143,94.073 16.476,90.958
  region: -21.06,84.16 -35.756,94.45 -35.836,94.335 -21.14,84.045
  region: -21.08,84.18 -31.37,98.876 -31.485,98.795 -21.195,84.1
  rectangle: -17.4,47.78 14,57.78
  region: 17.4,24.22 -14,24.22 -14,14.22 17.4,14.22
  rectangle: -17.54,12.5 -16,59.48
  region: 17.54,59.48 16,59.48 16,12.5 17.54,12.5
  lines w0.1: -48.29,45 41.68,45 ; -48.19,36 41.78,36 ; -35.9,80.5 41.35,80.5 ; -30,79 cw(c-16,79) -16,93 ; -27.84,90.84 -16.74,79.74 ; -24,18 -24,14.5 ccw(c-22,14.5) -22,12.5 -16,12.5 -16,59.5 -22,59.5 ccw(c-22,57.5) -24,57.5 -24,54 ; -17.62,80 -15.54,80 ; -17.5,79 -17.5,96.95 ; -17,79.92 -17,81.38 ; -16,44.8 14,44.8 14,60.8 -16,60.8 -16,59.25 ; 0,-7 0,97 ; 12,75 28.1,91.1 ; 14.64,80 18.82,80 ; 16,12.75 16,11.2 -14,11.2 -14,27.2 16,27.2 ; 16,93 cw(c16,79) 30,79 ; 17,78.4 17,80.48 ; 17.5,79 17.5,96.95 ; 24,18 24,14.5 cw(c22,14.5) 22,12.5 16,12.5 16,59.5 22,59.5 cw(c22,57.5) 24,57.5 24,54
  text "ON" at -30.84,15.92 h1.5
  text "OFF" at -28.7,2.28 h1.5
Bottom Overlay:
  rectangle: -17.46,11.68 17.46,54.34
  lines w0.1: -17.5,18 -17.5,7 17.5,7 17.5,18 ; -17.5,54 -17.5,59 17.5,59 17.5,54
Top Solder:
  rectangle: 7.06,5.8 10.42,7.52

## Text inside footprints (layer, text, board x,y; h text height)
LS1: Top Overlay "+" at 5.14,91.72 h1 r270
U8: Top Overlay "1" at 28.77,62.294 h0.51 r180; Top Overlay "2" at 26.484,62.294 h0.51 r180; Top Overlay "O N" at 28.453,57.341 h0.76 r180